# EAGLE board HeartSparkBar_V2p0 (EAGLE 6.3)
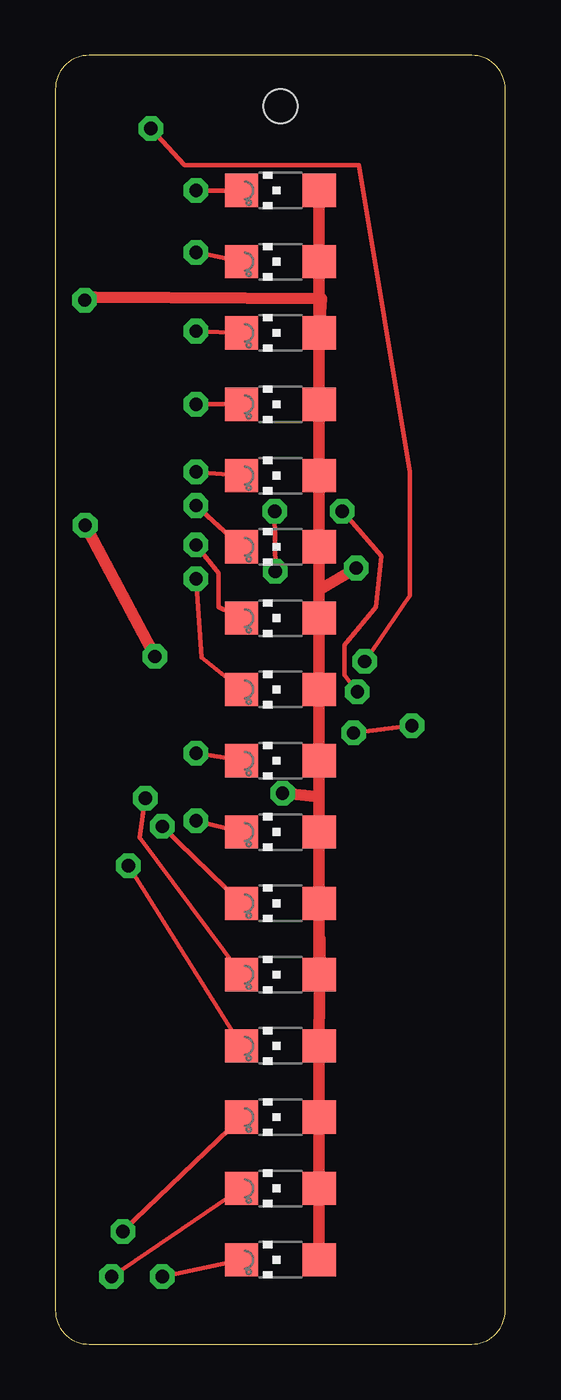
[diagram p0: board, top side]
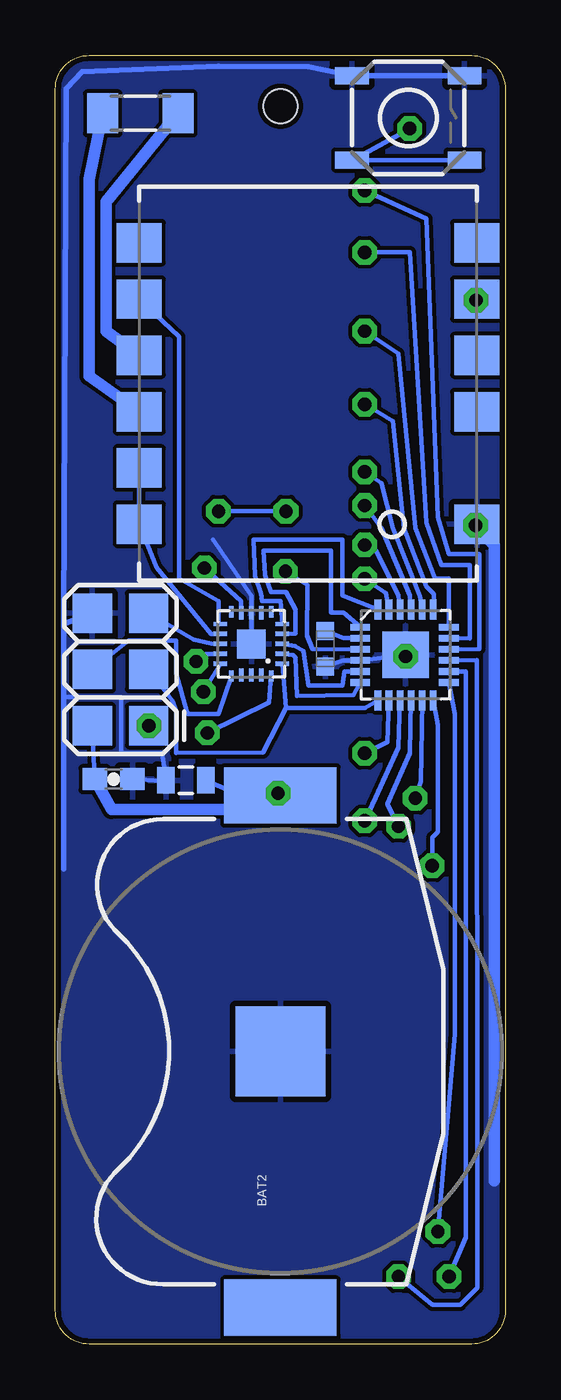
[diagram p1: board, bottom side, seen from below]

Size 20.32 x 58.17 mm. Coordinates in mm from the lower left corner, seen from the top.
Outline: 18.8,0 arc90 20.32,1.52 20.32,56.64 arc90 18.8,58.17 1.52,58.17 arc90 0,56.64 0,1.52 arc90 1.52,0 18.8,0
Copper layers (1*16): Top 0.035mm / dielectric 1.5mm / Bottom 0.035mm
Design rules "SparkFun *": minimum track width 8mil, minimum drill 20mil, track to track 7mil, track to pad 6mil, pad to pad 6mil, via to via 8mil, smd to smd 6mil, copper to edge 10mil, drill to drill 8mil, minimum pad ring 12mil, minimum via ring 10mil, stop-mask expansion 4mil, vias tented up to drill 25mil, thermal gap 10mil
Net classes: 0 default: width 0.203 mm, clearance 0.178 mm; 1 power: width 0.203 mm, clearance 0.152 mm; 2 gnd: width 0.203 mm, clearance 0.152 mm
Holes 1.52 mm at 10.16,55.88

## Footprints (pad centres in the part's own frame; a part is rotated, then mirrored left to right if it is on the bottom)
BATTCON_20MM_COMPACT = smd 2.54 x 5.08: 1 -11.557,0; 3 11.557,0 | smd 4.064 x 4.064: 2 0,0
0603-CAP = smd 1.1 x 1: 1 -0.85,0; 2 0.85,0
0805 = smd 0.8 x 1.2: 1 -0.9,0; 2 0.9,0
CHIPLED_1206 = smd 1.5 x 1.5: A 0,-1.75; C 0,1.75
M1406 = smd 1.4 x 1.8: 1 -1.7,0; 2 1.7,0
0603_TANJ = smd 0.8 x 0.8: P$1 -0.8,0; P$2 0.8,0
TACTILE_SWITCH_SMD = smd 1.524 x 0.762: 1 -2.54,1.905; 2 2.54,1.905; 3 -2.54,-1.905; 4 2.54,-1.905
QFN-24_ALT2 = smd 0.9 x 0.3: 1 -2.05,1.25; 2 -2.05,0.75; 3 -2.05,0.25; 4 -2.05,-0.25; 5 -2.05,-0.75; 6 -2.05,-1.25; 13 1.95,-1.25; 14 1.95,-0.75; 15 1.95,-0.25; 16 1.95,0.25; 17 1.95,0.75; 18 1.95,1.25 | smd 0.3 x 0.9: 7 -1.25,-2.05; 8 -0.75,-2.05; 9 -0.25,-2.05; 10 0.25,-2.05; 11 0.75,-2.05; 12 1.25,-2.05; 19 1.25,2.05; 20 0.75,2.05; 21 0.25,2.05; 22 -0.25,2.05; 23 -0.75,2.05; 24 -1.25,2.05 | smd 2.1 x 2.1: EP 0,0
RMCM01 = smd 1.778 x 2.032: 1 -6.35,7.62; 2 -3.81,7.62; 3 -1.27,7.62; 4 1.27,7.62; 5 3.81,7.62; 6 6.35,7.62; 7 6.35,-7.62; 8 3.81,-7.62; 9 1.27,-7.62; 10 -1.27,-7.62; 11 -6.35,-7.62
ATTINY24_VQFN = smd 0.6 x 0.2: 1 -1.395,0.905; 2 -1.395,0.455; 3 -1.395,0.005; 4 -1.395,-0.445; 5 -1.395,-0.895; 11 1.405,-0.895; 12 1.405,-0.445; 13 1.405,0.005; 14 1.405,0.455; 15 1.405,0.905 | smd 0.2 x 0.5: 6 -0.895,-1.445; 10 0.905,-1.445; 16 0.905,1.455; 20 -0.895,1.455 | smd 0.2 x 0.6: 7 -0.445,-1.395; 8 0.005,-1.395; 9 0.455,-1.395; 17 0.455,1.405; 18 0.005,1.405; 19 -0.445,1.405 | smd 1.3 x 1.3: P$1 0.005,0.005
2X3 = smd 1.778 x 1.778: 1 0,0; 2 0,2.54; 3 2.54,0; 4 2.54,2.54; 5 5.08,0; 6 5.08,2.54

## Placement (x,y rotation side)
BAT2  [BATTCON_20MM_COMPACT]  10.16,13.21 90 bottom
CF  0.1  [0603-CAP]  17.69,25.5 0 bottom
CP  22  [0805]  14.43,25.45 180 bottom
LED1  [CHIPLED_1206]  10.16,26.33 90 top
LED2  [CHIPLED_1206]  10.16,23.11 90 top
LED3  [CHIPLED_1206]  10.16,19.9 90 top
LED4  [CHIPLED_1206]  10.16,16.68 90 top
LED5  [CHIPLED_1206]  10.16,39.2 90 top
LED6  [CHIPLED_1206]  10.16,10.24 90 top
LED7  [CHIPLED_1206]  10.16,42.42 90 top
LED8  [CHIPLED_1206]  10.16,13.46 90 top
LED9  [CHIPLED_1206]  10.16,45.64 90 top
LED10  [CHIPLED_1206]  10.16,48.85 90 top
LED11  [CHIPLED_1206]  10.16,52.07 90 top
LED12  [CHIPLED_1206]  10.16,3.81 90 top
LED13  [CHIPLED_1206]  10.16,7.03 90 top
LED14  [CHIPLED_1206]  10.16,35.98 90 top
LED15  [CHIPLED_1206]  10.16,32.77 90 top
LED16  [CHIPLED_1206]  10.16,29.55 90 top
Q3  32.768  [M1406]  16.48,55.55 0 bottom
RB1  33k  [0603_TANJ]  8.13,31.38 90 bottom
SW1  [TACTILE_SWITCH_SMD]  4.38,55.34 0 bottom
U1  A6282-ES  [QFN-24_ALT2]  4.5,31.11 0 bottom
U2  RMCM01SMD  [RMCM01]  8.92,43.36 90 bottom
U$1  ATTINY24_VQFN  [ATTINY24_VQFN]  11.47,31.61 180 bottom
U$3  AVR_SPI_PRG_6_SMT  [2X3]  16.11,27.91 90 bottom

## Library data of the parts
BAT2 U$1 U$3 = EricBoyd
CF CP SW1 U1 U2 = SparkFun
LED1-LED16 = led
Q3 = resistor
RB1 = tanjent

## Nets
A6282PWR: U1.3 U$1.15
BT: SW1.3 SW1.4 U$1.14
GND [gnd]: BAT2.2 CF.2 CP.2 RB1.P$1 SW1.1 SW1.2 U1.4 U1.EP U2.11 U$1.8 U$1.P$1 U$3.6
HEART_INT: U2.5 U$1.11
MISO: U$1.20 U$3.1
MOSI: U$1.16 U$3.4
N$1: LED1.C U1.8
N$2: LED4.C U1.11
N$3: LED5.C U1.20
N$4: LED10.C U1.17
N$5: Q3.2 U2.4
N$6: LED16.C U1.23
N$7: Q3.1 U2.3
N$8: LED15.C U1.22
N$9: LED14.C U1.21
N$10: LED7.C U1.19
N$11: LED9.C U1.18
N$12: LED13.C U1.14
N$13: LED11.C U1.16
N$14: LED12.C U1.15
N$15: LED6.C U1.13
N$16: LED8.C U1.12
N$17: LED3.C U1.10
N$18: U1.5 U$1.3
N$19: U1.1 U$1.4
N$20: U1.24 U$1.5
N$21: U1.6 U$1.2
N$22: LED2.C U1.9
N$23: RB1.P$2 U1.2
POLARPWR: U2.1 U2.2 U$1.12
RESET: U$1.13 U$3.5
SCK: U1.7 U$1.1 U$3.3
VCC [power]: BAT2.3 CF.1 CP.1 LED1.A LED2.A LED3.A LED4.A LED5.A LED6.A LED7.A LED8.A LED9.A LED10.A LED11.A LED12.A LED13.A LED14.A LED15.A LED16.A U2.8 U$1.9 U$3.2

## Tracks (layer width: path | path; a pad name or v marks a point on that pad's centre or on a via)
A6282PWR  (via drill 0.6)
  Top 0.203: v9.93,34.87 v9.91,37.59 | v12.95,37.59 14.73,35.56 14.48,33.27 13.06,31.55 13.06,30.2 v13.64,29.44
  Bottom 0.203: U1.3 8.71,31.37 8.97,31.98 8.94,34.27 v9.93,34.87 | v9.91,37.59 v12.95,37.59 | v13.64,29.44 U$1.15
BT  (via drill 0.6)
  Top 0.203: v4.32,54.86 5.84,53.21 13.72,53.21 16,39.37 16,33.78 v13.97,30.81
  Bottom 0.203: SW1.4 SW1.3 6.6,53.59 v4.32,54.86 | v13.97,30.81 13.54,31.14 U$1.14
GND  (via drill 0.6)
  Top 0.508: v1.35,36.96 v4.5,31.04
  Bottom 0.203: RB1.P$1 7.34,30.86 U1.4 U1.EP v4.5,31.04 | CF.2 15.24,25.4 CP.2 15.49,26.67 17.35,26.67 17.35,29.21 19.94,29.21 | 12.95,57.68 13.34,57.68 | 13.21,36.32 11.46,33.76 U$1.8 U$1.P$1 | v1.35,36.96 U2.11
  Bottom 0.254: 19.94,32.51 U$3.6 | SW1.2 SW1.1 8.89,57.66 12.95,57.68 19.11,57.43 19.84,56.67 19.94,32.51 | 19.94,21.44 19.94,29.21 19.94,32.51
  Bottom 0.508: 0.51,7.37 0.51,36.07 v1.35,36.96
  pour Bottom: 0,0 20.32,0 20.32,58.17 0,58.17
HEART_INT
  Bottom 0.203: U$1.11 12.95,32.5 12.95,33.53 14.73,34.54 14.73,45.47 U2.5
MISO  (via drill 0.6)
  Top 0.203: v13.46,27.58 v16.1,27.91
  Bottom 0.203: U$1.20 10.67,28.96 v13.46,27.58 | v16.1,27.91 U$3.1
MOSI
  Bottom 0.203: U$3.4 17.02,31.75 14.86,31.75 14.86,30.28 14.35,28.45 12.95,28.45 U$1.16
N$1  (via drill 0.6)
  Top 0.203: v6.35,26.67 LED1.C
  Bottom 0.203: U1.8 5.33,27.18 v6.35,26.67
N$2  (via drill 0.6)
  Top 0.203: v4.06,24.64 3.81,22.86 LED4.C
  Bottom 0.203: U1.11 3.81,25.4 v4.06,24.64
N$3  (via drill 0.6)
  Top 0.203: v6.35,39.37 LED5.C
  Bottom 0.203: U1.20 3.86,33.76 5.08,36.83 5.59,38.86 v6.35,39.37
N$4  (via drill 0.6)
  Top 0.203: v6.35,49.28 LED10.C
  Bottom 0.203: U1.17 1.6,31.85 1.6,35.15 2.9,35.15 3.56,37.08 4.32,49.28 v6.35,49.28
N$5
  Bottom 0.508: U2.4 18.03,45.72 18.03,51.56 Q3.2
N$6  (via drill 0.6)
  Top 0.203: LED16.C 6.6,30.99 v6.35,34.54
  Bottom 0.203: U1.23 5.38,33.91 5.97,34.29 v6.35,34.54
N$7
  Bottom 0.508: U2.3 18.8,43.69 18.8,52.58 Q3.1
N$8  (via drill 0.6)
  Top 0.203: v6.35,36.07 7.37,34.8 7.37,33.27 LED15.C
  Bottom 0.203: U1.22 4.83,33.78 5.84,35.81 v6.35,36.07
N$9  (via drill 0.6)
  Top 0.203: v6.35,37.85 LED14.C
  Bottom 0.203: U1.21 4.32,33.78 5.59,36.83 v6.35,37.85
N$10  (via drill 0.6)
  Top 0.203: v6.35,42.42 LED7.C
  Bottom 0.203: U1.19 3.23,33.86 3.56,34.19 4.57,36.83 5.08,41.66 v6.35,42.42
N$11  (via drill 0.6)
  Top 0.203: v6.35,45.72 LED9.C
  Bottom 0.203: U1.18 2.54,34.54 3.17,34.57 4.06,36.83 4.83,44.7 v6.35,45.72
N$12  (via drill 0.6)
  Top 0.203: v2.54,3.05 LED13.C
  Bottom 0.203: U1.14 1.78,30.35 1.78,10.67 1.78,4.83 v2.54,3.05
N$13  (via drill 0.6)
  Top 0.203: v6.35,52.07 LED11.C
  Bottom 0.203: U1.16 1.17,31.37 1.17,35.66 2.54,35.66 3.05,37.34 3.56,50.8 v6.35,52.07
N$14  (via drill 0.6)
  Top 0.203: v4.83,3.05 LED12.C
  Bottom 0.203: U1.15 1.29,30.89 1.27,7.87 1.27,2.54 2.03,1.78 3.3,1.78 v4.83,3.05
N$15  (via drill 0.6)
  Top 0.203: v3.05,5.08 LED6.C
  Bottom 0.203: U1.13 2.29,28.45 2.29,13.97 v3.05,5.08
N$16  (via drill 0.6)
  Top 0.203: LED8.C v3.3,21.59
  Bottom 0.203: U1.12 3.05,27.94 3.05,23.11 3.3,22.86 v3.3,21.59
N$17  (via drill 0.6)
  Top 0.203: LED3.C v4.83,23.37
  Bottom 0.203: v4.83,23.37 5.33,24.38 4.32,26.67 U1.10
N$18
  Bottom 0.203: U1.5 7.26,30.35 7.37,29.72 8.89,29.72 9.11,31.27 9.49,31.51 U$1.3
N$19
  Bottom 0.203: U1.1 7.32,33.02 7.87,33.02 7.87,35.81 10.92,35.81 10.85,34.72 10.59,33.93 9.91,33.93 9.47,33.15 9.47,32.08 U$1.4
N$20
  Bottom 0.203: U1.24 7.37,33.78 7.37,36.32 11.38,36.32 11.3,34.67 11.02,33.88 11,33.53 10.16,33.53 U$1.5
N$21
  Bottom 0.203: U1.6 6.86,29.29 9.4,29.26 9.47,30.98 9.58,31.1 U$1.2
N$22  (via drill 0.6)
  Top 0.203: v6.35,23.62 LED2.C
  Bottom 0.203: U1.9 4.83,26.92 v6.35,23.62
N$23
  Bottom 0.203: U1.2 7.32,31.88 RB1.P$2
POLARPWR
  Bottom 0.203: U2.2 U2.1 15.75,35.05 13.28,32.05 U$1.12
RESET
  Bottom 0.203: U$1.13 13.28,31.62 14.07,31.8 U$3.5
SCK
  Bottom 0.203: U1.7 6.35,28.7 9.91,28.7 | 9.91,28.7 10.95,26.71 14.86,26.67 14.86,28.57 15.02,29.04 U$3.3 | 9.91,28.7 U$1.1
VCC  (via drill 0.6)
  Top 0.508: LED12.A LED13.A LED6.A LED8.A 11.94,18.29 LED4.A LED3.A LED2.A 11.91,24.69 | LED11.A LED10.A LED9.A | LED9.A LED7.A LED5.A LED14.A LED15.A | LED15.A LED16.A LED1.A 11.91,24.69 | LED15.A 11.91,34.04 v13.59,35.03 | LED9.A 12.01,47.19 1.78,47.24 v1.32,47.12 | 11.91,24.69 v10.26,24.87
  Bottom 0.203: CF.1 U$3.2 | v13.59,35.03 11.94,33.53 U$1.9 | 10.41,24.13 CP.1 | 10.41,24.13 v10.26,24.87 BAT2.3 | 10.41,24.13 11.18,24.13
  Bottom 0.508: CF.1 17.78,24.13 11.18,24.13 | v1.32,47.12 U2.8

## Text on the board
200bmp: Heart | Spark | V2.0 | sensebridge.com